# EAGLE board button3 (EAGLE 9.6.2)
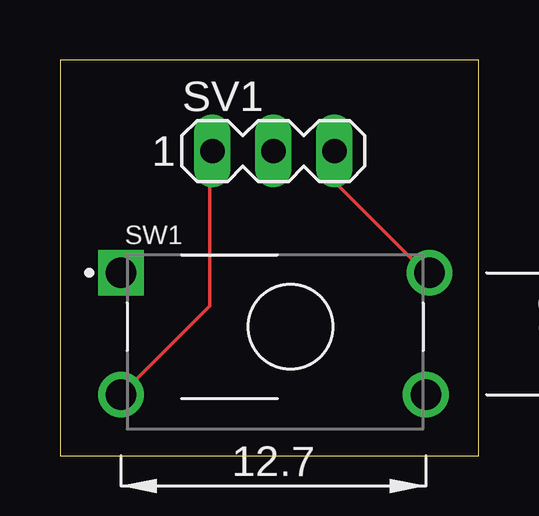
[diagram p0: board, top side]

Size 17.45 x 16.5 mm. Coordinates in mm from the lower left corner, seen from the top.
Outline: 0,0 17.45,0 17.45,16.5 0,16.5 0,0
Copper layers (1*16): Top 0.035mm / dielectric 1.5mm / Bottom 0.035mm
Design rules "default": minimum track width 6mil, minimum drill 0.35mm, track to track 6mil, track to pad 6mil, pad to pad 6mil, via to via 6mil, smd to smd 6mil, copper to edge 40mil, drill to drill 6mil, minimum pad ring 10mil, minimum via ring 8mil, stop-mask expansion 4mil, vias tented up to drill 0mil, thermal gap 10mil

## Footprints (pad centres in the part's own frame; a part is rotated, then mirrored left to right if it is on the bottom)
MA03-1 = drill 1.016 long: 1 -2.54,0; 2 0,0; 3 2.54,0
TE_1825910-2 = drill 1.27 square: 1 -1.27,0 | drill 1.27: 2 11.58,0; 3 -1.27,-5.08; 4 11.43,-5.08

## Placement (x,y rotation side)
SV1  [MA03-1]  8.89,12.7 0 top
SW1  1825910-2  [TE_1825910-2]  3.81,7.62 0 top

## Library data of the parts
SV1 = con-lstb; OC_FARNELL: unknown; OC_NEWARK: unknown
SW1 = 1825910-2; AVAILABILITY: In Stock; COMMENT: 1825910-2; CONFIGURATION_POLE-THROW: Single Pole - Single Throw; CONTACT_CURRENT_RATING: 50 mA; DESCRIPTION: 50 mA SPST Round Actuator 160 Gram Force Tactile Pushbutton Switch; EU_ROHS_COMPLIANCE: Compliant; MF: TE Connectivity; MP: 1825910-2; PACKAGE: None; PRICE: None; PURCHASE-URL: https://pricing.snapeda.com/search/part/1825910-2/?ref=eda

## Nets
GND: SV1.3 SW1.2
N$1: SV1.1 SW1.3

## Tracks (layer width: path | path; a pad name or v marks a point on that pad's centre or on a via)
GND
  Top 0.152: SV1.3 11.43,11.43 15.24,7.62 SW1.2
N$1
  Top 0.152: SW1.3 6.25,6.25 6.25,12.65 SV1.1